# Altium PCB control_board_v2.PcbDoc (part 2 of 2)
Units mil, origin at the board's own origin, x right, y up, seen from the top; angles counter-clockwise.
Board outline 4214.76 x 4940 mil, 2 copper layers (Top Layer, Bottom Layer); 54 components, 71 nets, 299 pads, 38 vias.
Unrouted connection lines stored in the file: 3.
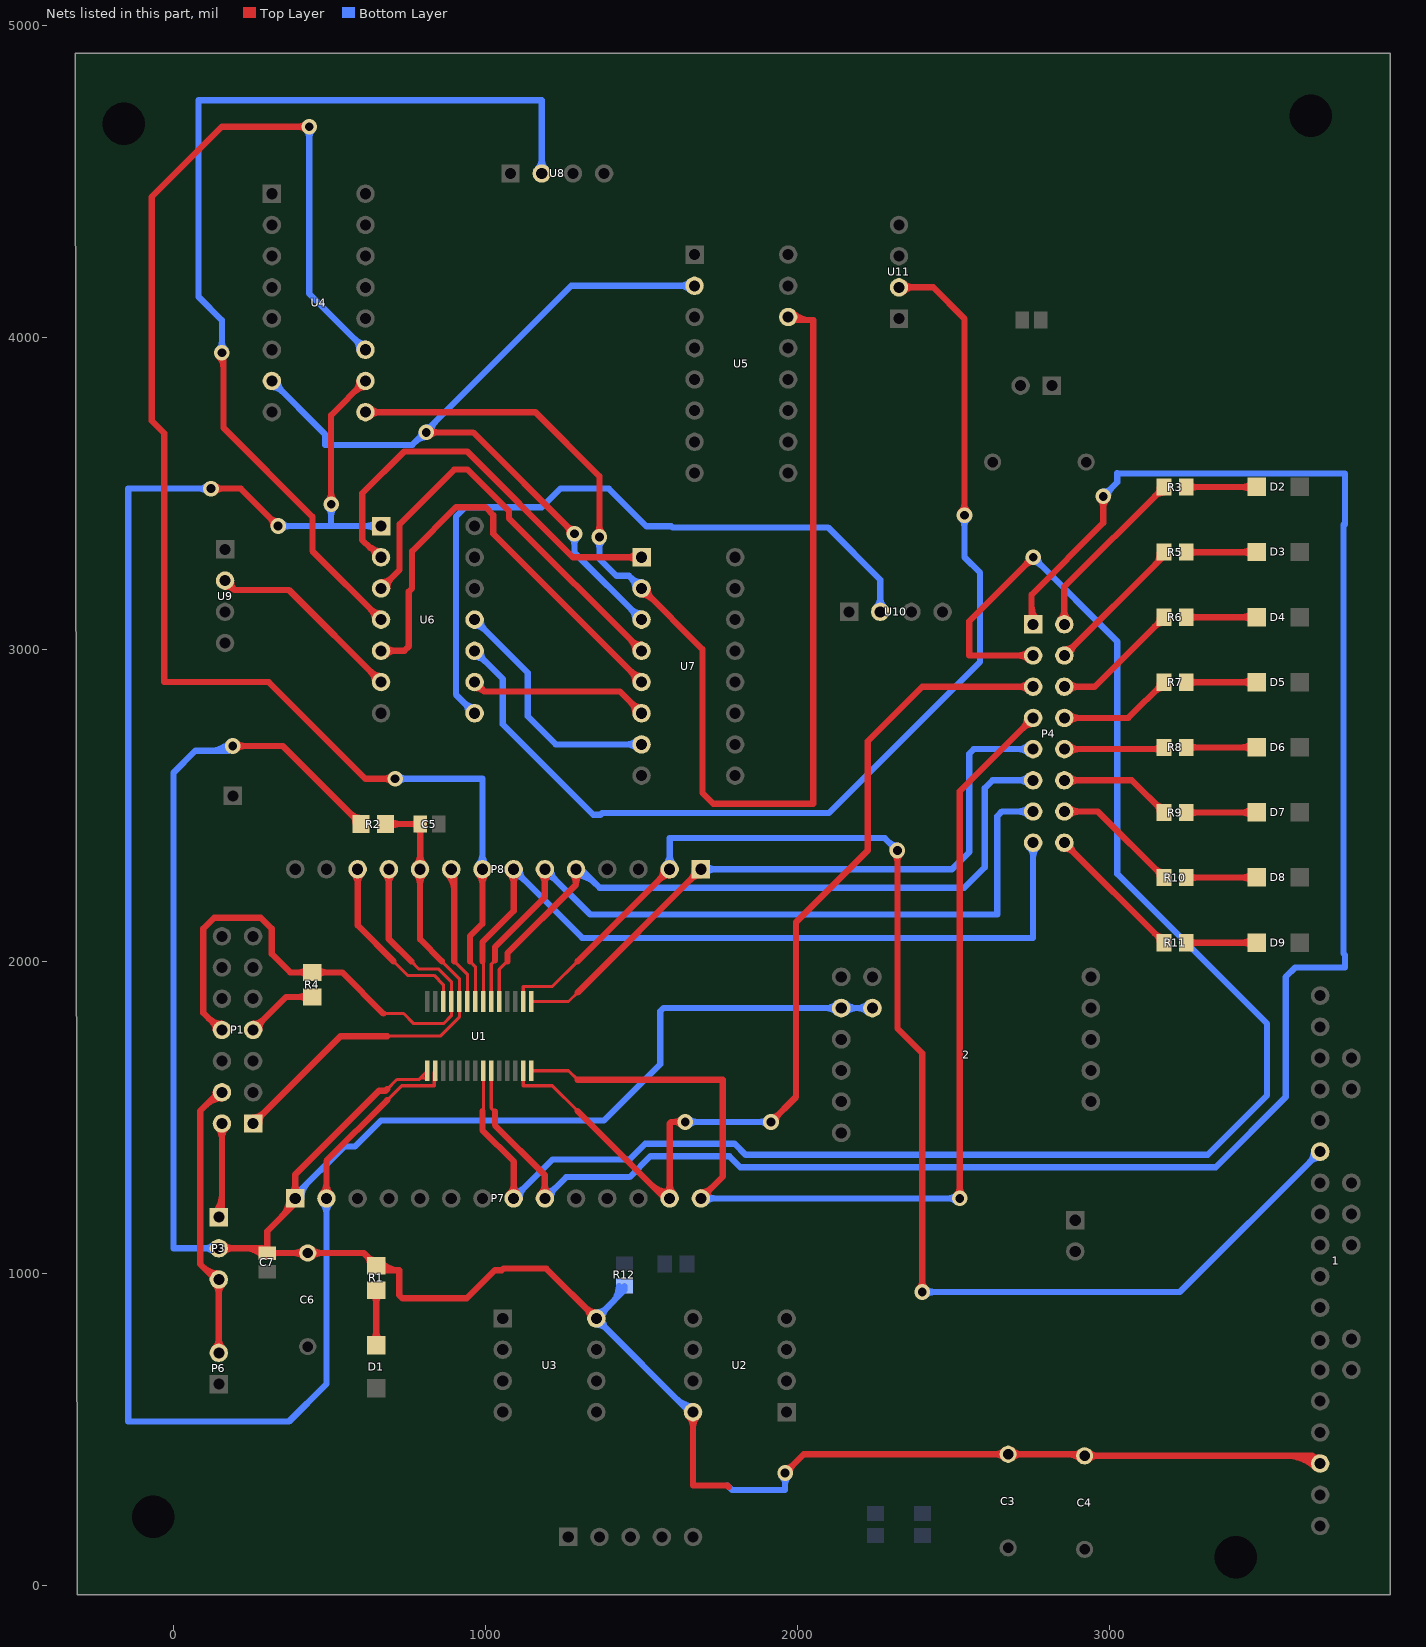
[diagram p2: the nets of this part, all layers, seen from the top]

## Via types
v1: diameter 50, hole 28, Top Layer to Bottom Layer, 38 vias

## Nets (pads, with @x,y where several pads share a name; then routed paths per layer and width w, separated by ;. In a path a pad name is that pad's centre, name@x,y a point inside that pad or via, vN(x,y) a via of type N, cw(c..) or ccw(c..) an arc to the next point about the centre after c; other vN are vias at no path point) (continued)
M2IN2: 1.12 P8.2 U1.16 | length 4880.6
  Top Layer w10: U1.16@1120.75,1871 1120.75,1919 1214,1919 1295,2000
  Top Layer w20: 1295,2000 P8.2@1590,2295 ; P8.2@1570.47,2295 cw(c1523.33,2295) 1556.66,2261.66 cw(c1590,2228.33) P8.2@1590,2275.47 ; v1@2309.39,2344.39 cw(c2283.79,2318.79) 2320,2318.79 cw(c2356.21,2318.79) v1@2330.61,2344.39 ; v1(2320,2355) 2320,1785 2400,1705 v1(2400,940) ; v1@2389.39,950.61 ccw(c2363.79,976.21) 2400,976.21 ccw(c2436.21,976.21) v1@2410.61,950.61
  Bottom Layer w20: P8.2@1576.19,2308.81 ccw(c1542.86,2342.14) 1590,2342.14 ccw(c1637.14,2342.14) P8.2@1603.81,2308.81 ; P8.2@1590,2295 1590,2395 2280,2395 v1(2320,2355) ; v1@2305,2355 ccw(c2268.79,2355) 2294.39,2380.61 ccw(c2320,2406.21) v1@2320,2370 ; v1(2400,940) 3225,940 1.12@3675,1390 ; v1@2410.61,929.39 cw(c2436.21,903.79) 2436.21,940 cw(c2436.21,976.21) v1@2410.61,950.61 ; 1.12@3655,1390 cw(c3606.72,1390) 3640.86,1355.86 cw(c3675,1321.72) 1.12@3675,1370
NetD1_1: D1.1 R1.1 | length 317.4
  Top Layer w20: D1.1@636.19,782.71 ccw(c602.86,816.04) 650,816.04 ccw(c697.14,816.04) D1.1@663.81,782.71 ; R1.1@637.58,933.21 cw(c607.61,903.24) 650,903.24 cw(c692.39,903.24) R1.1@662.42,933.21 ; D1.1@650,768.9 650,945 R1.1@650,945.63
NetD2_1: D2.1 R3.2 | length 351.6
  Top Layer w20: R3.2@3245.43,3520 3470.58,3520 D2.1@3471.1,3520.52 ; R3.2@3255.07,3510.37 cw(c3278.32,3487.11) 3278.32,3520 cw(c3278.32,3552.89) R3.2@3255.07,3529.63 ; 3422.7,3520 ccw(c3422.7,3568.92) D2.1@3457.29,3534.33 ; 3425.21,3520 cw(c3425.21,3474.63) D2.1@3457.29,3506.71
NetD3_1: D3.1 R5.2 | length 351.6
  Top Layer w20: R5.2@3245.43,3311.35 3470.58,3311.35 D3.1@3471.1,3311.87 ; R5.2@3255.07,3301.72 cw(c3278.32,3278.47) 3278.32,3311.35 cw(c3278.32,3344.24) R5.2@3255.07,3320.99 ; 3422.7,3311.35 ccw(c3422.7,3360.27) D3.1@3457.29,3325.68 ; 3425.21,3311.35 cw(c3425.21,3265.99) D3.1@3457.29,3298.07
NetD4_1: D4.1 R6.2 | length 351.6
  Top Layer w20: R6.2@3245.43,3102.71 3470.58,3102.71 D4.1@3471.1,3103.23 ; R6.2@3255.07,3093.08 cw(c3278.32,3069.82) 3278.32,3102.71 cw(c3278.32,3135.59) R6.2@3255.07,3112.34 ; 3422.7,3102.71 ccw(c3422.7,3151.63) D4.1@3457.29,3117.04 ; 3425.21,3102.71 cw(c3425.21,3057.34) D4.1@3457.29,3089.42
NetD5_1: D5.1 R7.2 | length 351.6
  Top Layer w20: R7.2@3245.43,2894.06 3470.58,2894.06 D5.1@3471.1,2894.58 ; R7.2@3255.07,2884.43 cw(c3278.32,2861.18) 3278.32,2894.06 cw(c3278.32,2926.95) R7.2@3255.07,2903.7 ; 3422.71,2894.06 ccw(c3422.71,2942.98) D5.1@3457.29,2908.39 ; 3425.21,2894.06 cw(c3425.21,2848.69) D5.1@3457.29,2880.77
NetD6_1: D6.1 R8.2 | length 351.6
  Top Layer w20: R8.2@3245.43,2685.42 3470.58,2685.42 D6.1@3471.1,2685.94 ; R8.2@3255.07,2675.79 cw(c3278.32,2652.53) 3278.32,2685.42 cw(c3278.32,2718.3) R8.2@3255.07,2695.05 ; 3422.71,2685.42 ccw(c3422.71,2734.33) D6.1@3457.29,2699.74 ; 3425.21,2685.42 cw(c3425.21,2640.04) D6.1@3457.29,2672.13
NetD7_1: D7.1 R9.2 | length 351.6
  Top Layer w20: R9.2@3245.43,2476.77 3470.58,2476.77 D7.1@3471.1,2477.29 ; R9.2@3255.07,2467.14 cw(c3278.32,2443.89) 3278.32,2476.77 cw(c3278.32,2509.66) R9.2@3255.07,2486.4 ; 3422.7,2476.77 ccw(c3422.7,2525.69) D7.1@3457.29,2491.1 ; 3425.21,2476.77 cw(c3425.21,2431.4) D7.1@3457.29,2463.48
NetD8_1: D8.1 R10.2 | length 351.6
  Top Layer w20: R10.2@3245.43,2268.13 3470.58,2268.13 D8.1@3471.1,2268.65 ; R10.2@3255.07,2258.49 cw(c3278.32,2235.24) 3278.32,2268.13 cw(c3278.32,2301.01) R10.2@3255.07,2277.76 ; 3422.7,2268.13 ccw(c3422.7,2317.04) D8.1@3457.29,2282.45 ; 3425.21,2268.13 cw(c3425.21,2222.76) D8.1@3457.29,2254.84
NetD9_1: D9.1 R11.2 | length 351.6
  Top Layer w20: R11.2@3245.43,2059.48 3470.58,2059.48 D9.1@3471.1,2060 ; R11.2@3255.07,2049.85 cw(c3278.32,2026.59) 3278.32,2059.48 cw(c3278.32,2092.37) R11.2@3255.07,2069.11 ; 3422.7,2059.48 ccw(c3422.7,2108.4) D9.1@3457.29,2073.81 ; 3425.21,2059.48 cw(c3425.21,2014.11) D9.1@3457.29,2046.19
NetP4_2: P4.2 R3.1 | length 698.1
  Top Layer w20: P4.2@2841.19,3093.81 ccw(c2807.86,3127.14) 2855,3127.14 ccw(c2902.14,3127.14) P4.2@2868.81,3093.81 ; P4.2@2855,3080 2855,3200.43 R3.1@3174.57,3520 ; 3144.59,3490.02 cw(c3174.57,3460.05) R3.1@3174.57,3502.44 ; R3.1@3154.1,3499.53 ccw(c3137.56,3516.06) R3.1@3160.95,3516.06
NetP4_4: P4.4 R5.1 | length 578.5
  Top Layer w20: P4.4@2855,2980 3174.57,3299.57 R5.1@3174.57,3311.35 ; P4.4@2855,2999.53 ccw(c2855,3046.67) 2888.34,3013.34 ccw(c2921.67,2980) P4.4@2874.53,2980 ; 3145.76,3270.76 ccw(c3109.11,3307.42) R5.1@3160.95,3307.42
NetP4_6: P4.6 R6.1 | length 537.5
  Top Layer w20: P4.6@2855,2880 2951.86,2880 R6.1@3174.57,3102.71 ; P4.6@2868.81,2866.19 cw(c2902.14,2832.86) 2902.14,2880 cw(c2902.14,2927.14) P4.6@2868.81,2893.81 ; 3144.59,3072.73 cw(c3174.57,3042.76) R6.1@3174.57,3085.15 ; R6.1@3154.1,3082.24 ccw(c3137.56,3098.77) R6.1@3160.95,3098.77
NetP4_8: P4.8 R7.1 | length 492.5
  Top Layer w20: P4.8@2855,2780 3060.5,2780 R7.1@3174.57,2894.06 ; P4.8@2868.81,2766.19 cw(c2902.14,2732.86) 2902.14,2780 cw(c2902.14,2827.14) P4.8@2868.81,2793.81 ; 3144.59,2864.09 cw(c3174.57,2834.11) R7.1@3174.57,2876.51 ; R7.1@3154.1,2873.59 ccw(c3137.56,2890.13) R7.1@3160.95,2890.13
NetP4_10: P4.10 R8.1 | length 447.5
  Top Layer w20: P4.10@2855,2680 3169.15,2680 R8.1@3174.57,2685.42 ; P4.10@2868.81,2666.19 cw(c2902.14,2632.86) 2902.14,2680 cw(c2902.14,2727.14) P4.10@2868.81,2693.81 ; 3138.11,2680 ccw(c3138.11,2717.94) R8.1@3164.94,2691.11 ; 3145.26,2680 cw(c3145.26,2652.17) R8.1@3164.94,2671.85
NetP4_12: P4.12 R9.1 | length 488
  Top Layer w20: P4.12@2855,2580 3071.34,2580 R9.1@3174.57,2476.77 ; P4.12@2868.81,2566.19 cw(c2902.14,2532.86) 2902.14,2580 cw(c2902.14,2627.14) P4.12@2868.81,2593.81 ; 3144.59,2506.75 ccw(c3174.57,2536.72) R9.1@3174.57,2494.33 ; R9.1@3154.1,2497.24 cw(c3137.56,2480.71) R9.1@3160.95,2480.71
NetP4_14: P4.14 R10.1 | length 533
  Top Layer w20: P4.14@2855,2480 2962.69,2480 R10.1@3174.57,2268.13 ; P4.14@2868.81,2466.19 cw(c2902.14,2432.86) 2902.14,2480 cw(c2902.14,2527.14) P4.14@2868.81,2493.81 ; 3144.59,2298.1 ccw(c3174.57,2328.08) R10.1@3174.57,2285.68 ; R10.1@3154.1,2288.6 cw(c3137.56,2272.06) R10.1@3160.95,2272.06
NetP4_16: P4.16 R11.1 | length 578.6
  Top Layer w20: P4.16@2855,2360.47 cw(c2855,2315.63) 2886.71,2347.34 ; P4.16@2855,2380 2855,2379.05 R11.1@3174.57,2059.48 ; P4.16@2874.53,2380 ccw(c2923.97,2380) 2889.01,2345.04 ; 3144.59,2089.46 ccw(c3174.57,2119.43) R11.1@3174.57,2077.04 ; R11.1@3154.1,2079.95 cw(c3137.56,2063.42) R11.1@3160.95,2063.42
P1.7/TDO: P8.9 U1.23 | length 509.2
  Top Layer w10: 900,2000 941.61,1958.39 U1.23@941.61,1871
  Top Layer w20: P8.9@876.19,2281.19 cw(c818.71,2223.71) 900,2223.71 ; P8.9@890,2295 900,2285 900,2000
P2.7: P8.12 U1.26 | length 661.8
  Top Layer w10: 704.87,2000 749.87,1955 835,1955 864.84,1925.16 U1.26@864.84,1871
  Top Layer w20: P8.12@576.19,2281.19 cw(c542.86,2247.86) 590,2247.86 cw(c637.14,2247.86) P8.12@603.81,2281.19 ; P8.12@590,2295 590,2114.87 704.87,2000
P3.0: P4.1 P7.9 U1.9 | length 6874.4
  Top Layer w10: U1.9@1018.39,1649 1018.39,1529.41 1030,1517.8
  Top Layer w20: 1030,1517.8 1030,1475 1190,1315 P7.9@1190,1240 P7.9@1190,1225 ; P7.9@1176.19,1253.81 ccw(c1142.86,1287.14) 1190,1287.14 ccw(c1237.14,1287.14) P7.9@1203.81,1253.81 ; P4.1@2741.19,3093.81 ccw(c2719.93,3115.07) 2750,3115.07 ; 2750,3139.21 ccw(c2814.21,3139.21) P4.1@2768.81,3093.81 ; P4.1@2755,3080 2750,3085 2750,3175 2980,3405 v1(2980,3490) ; v1@2969.39,3479.39 cw(c2943.79,3453.79) 2980,3453.79 cw(c3016.21,3453.79) v1@2990.61,3479.39
  Bottom Layer w20: P7.9@1190,1240 1258.28,1308.28 1461.72,1308.28 1528.43,1375 1781.57,1375 1816.57,1340 3340,1340 3565,1565 3565,1950 3595,1980 3755,1980 3755,2020 3750,2025 3750,3400 ; P7.9@1190,1259.53 ccw(c1190,1306.67) 1223.34,1273.34 ccw(c1256.67,1240) P7.9@1209.53,1240 ; v1(2980,3490) 3025,3535 3025,3565 3026.25,3563.75 3755,3563.75 3755,3400 ; v1@2980,3505 ccw(c2980,3541.21) 3005.61,3515.61 ccw(c3031.21,3490) v1@2995,3490
P3.1: P4.3 P7.8 U1.8 | length 6022.6
  Top Layer w10: 992.8,1520 U1.8@992.8,1649
  Top Layer w20: 990,1520 990,1458.43 1090,1358.43 P7.8@1090,1240 P7.8@1090,1225 ; P7.8@1076.19,1253.81 ccw(c1042.86,1287.14) 1090,1287.14 ccw(c1137.14,1287.14) P7.8@1103.81,1253.81 ; v1@2740,3295 cw(c2703.79,3295) 2729.39,3269.39 cw(c2755,3243.79) v1@2755,3280 ; P4.3@2741.19,2966.19 ccw(c2707.86,2932.86) 2707.86,2980 ccw(c2707.86,3027.14) P4.3@2741.19,2993.81 ; P4.3@2755,2980 2550,2980 2550,3090 v1(2755,3295)
  Bottom Layer w20: P7.8@1090,1240 1215,1365 1461.86,1365 1511.86,1415 1798.14,1415 1833.14,1380 3315,1380 3505,1570 3505,1800 3025,2280 3025,3025 v1(2755,3295) ; P7.8@1090,1259.53 ccw(c1090,1306.67) 1123.34,1273.34 ccw(c1156.67,1240) P7.8@1109.53,1240 ; v1@2755,3280 cw(c2755,3243.79) 2780.61,3269.39 cw(c2806.21,3295) v1@2770,3295
P3.2: P4.5 P7.13 U1.13 | length 3610
  Top Layer w10: U1.13@1120.75,1649 1120.75,1601 1214,1601 1295,1520
  Top Layer w20: 1295,1520 P7.13@1582.5,1232.5 ; 1531.06,1283.94 ccw(c1590,1342.88) P7.13@1590,1259.53 ; P7.13@1576.19,1253.81 ccw(c1542.86,1287.14) 1590,1287.14 ccw(c1637.14,1287.14) P7.13@1603.81,1253.81 ; P7.13@1590,1240 1590,1480 1595,1485 v1(1640,1485) ; v1@1629.39,1474.39 ccw(c1603.79,1448.79) 1603.79,1485 ccw(c1603.79,1521.21) v1@1629.39,1495.61 ; v1(1915,1485) 1995,1565 1995,2125 2225,2355 2225,2705 2400,2880 P4.5@2755,2880 ; v1@1915,1500 ccw(c1915,1536.21) 1940.61,1510.61 ccw(c1966.21,1485) v1@1930,1485 ; P4.5@2741.19,2866.19 ccw(c2707.86,2832.86) 2707.86,2880 ccw(c2707.86,2927.14) P4.5@2741.19,2893.81
  Bottom Layer w20: v1(1640,1485) v1@1900,1485 ; v1@1650.61,1474.39 cw(c1676.21,1448.79) 1676.21,1485 cw(c1676.21,1521.21) v1@1650.61,1495.61 ; v1@1904.39,1474.39 ccw(c1878.79,1448.79) 1878.79,1485 ccw(c1878.79,1521.21) v1@1904.39,1495.61 ; v1@1907.5,1492.5 v1@1910,1495
P3.3: P4.7 P7.14 U1.14 | length 3837.9
  Top Layer w10: U1.14@1146.34,1649 1266,1649 1295,1620
  Top Layer w20: 1295,1620 1760,1620 1760,1310 P7.14@1690,1240 ; P7.14@1690,1259.53 ccw(c1690,1306.67) 1723.34,1273.34 ccw(c1756.67,1240) P7.14@1709.53,1240 ; v1@2509.39,1250.61 ccw(c2483.79,1276.21) 2520,1276.21 ccw(c2556.21,1276.21) v1@2530.61,1250.61 ; v1(2520,1240) 2520,2545 P4.7@2755,2780 ; P4.7@2735.47,2780 cw(c2688.33,2780) 2721.66,2746.66 cw(c2755,2713.33) P4.7@2755,2760.47
  Bottom Layer w20: P7.14@1690,1240 v1(2520,1240) ; P7.14@1703.81,1226.19 cw(c1737.14,1192.86) 1737.14,1240 cw(c1737.14,1287.14) P7.14@1703.81,1253.81 ; v1@2509.39,1229.39 ccw(c2483.79,1203.79) 2483.79,1240 ccw(c2483.79,1276.21) v1@2509.39,1250.61
P3.4: P4.9 P8.1 U1.15 | length 2350.4
  Top Layer w10: U1.15@1146.34,1871 1266,1871 1295,1900
  Top Layer w20: 1295,1900 P8.1@1690,2295 ; P8.1@1670.47,2295 cw(c1623.33,2295) 1656.66,2261.66 cw(c1690,2228.33) P8.1@1690,2275.47
  Bottom Layer w20: P8.1@1690,2295 2495,2295 2550,2350 2550,2665 2565,2680 P4.9@2755,2680 ; P8.1@1703.81,2281.19 cw(c1737.14,2247.86) 1737.14,2295 cw(c1737.14,2342.14) P8.1@1703.81,2308.81 ; P4.9@2741.19,2666.19 ccw(c2707.86,2632.86) 2707.86,2680 ccw(c2707.86,2727.14) P4.9@2741.19,2693.81
P3.5: P4.11 P8.5 U1.19 | length 2523.7
  Top Layer w10: U1.19@1045,1872.02 U1.19@1043.98,1871 1043.98,1973.98 1070,2000
  Top Layer w20: 1070,2000 1070,2026.02 1290,2246.02 P8.5@1290,2295 ; P8.5@1276.19,2281.19 cw(c1242.86,2247.86) 1290,2247.86 cw(c1337.14,2247.86) P8.5@1303.81,2281.19
  Bottom Layer w20: P8.5@1290,2275.47 cw(c1290,2190.15) 1350.33,2250.48 ; P8.5@1290,2295 1305.82,2295 1365.34,2235.47 2534.53,2235.47 2600,2300.94 2600,2555 2625,2580 P4.11@2755,2580 ; P4.11@2741.19,2566.19 ccw(c2707.86,2532.86) 2707.86,2580 ccw(c2707.86,2627.14) P4.11@2741.19,2593.81
P3.6: P4.13 P8.6 U1.20 | length 2663.5
  Top Layer w10: U1.20@1018.39,1871 1018.39,1990.59 1030,2002.2
  Top Layer w20: 1030,2002.2 1030,2045 1190,2205 P8.6@1190,2295 ; P8.6@1176.19,2281.19 cw(c1142.86,2247.86) 1190,2247.86 cw(c1237.14,2247.86) P8.6@1203.81,2281.19
  Bottom Layer w20: P8.6@1190,2275.47 cw(c1190,2228.33) 1223.34,2261.66 cw(c1256.67,2295) P8.6@1209.53,2295 ; P8.6@1190,2295 1335,2150 2640,2150 2640,2465 2655,2480 P4.13@2755,2480 ; P4.13@2741.19,2466.19 ccw(c2707.86,2432.86) 2707.86,2480 ccw(c2707.86,2527.14) P4.13@2741.19,2493.81
P3.7: P4.15 P8.7 U1.21 | length 2748.7
  Top Layer w10: U1.21@992.8,1871 992.8,2000
  Top Layer w20: 990,2000 990,2061.57 1090,2161.57 P8.7@1090,2295 ; P8.7@1076.19,2281.19 cw(c1042.86,2247.86) 1090,2247.86 cw(c1137.14,2247.86) P8.7@1103.81,2281.19
  Bottom Layer w20: P8.7@1090,2275.47 cw(c1090,2228.33) 1123.34,2261.66 cw(c1156.67,2295) P8.7@1109.53,2295 ; P8.7@1090,2295 1310,2075 2755,2075 P4.15@2755,2380 ; P4.15@2741.19,2366.19 cw(c2707.86,2332.86) 2755,2332.86 cw(c2802.14,2332.86) P4.15@2768.81,2366.19
RST/SBWTDIO: C5.2 P1.1 P8.10 R2.1 U1.24 | length 1961.9
  Top Layer w10: 685,1760 855,1760 916.02,1821.02 U1.24@916.02,1871 916.02,1943.98 860,2000
  Top Layer w20: P1.1@255,1480 535,1760 685,1760 ; P1.1@255,1499.53 ccw(c255,1546.67) 288.34,1513.34 ccw(c321.67,1480) P1.1@274.53,1480 ; R2.1@679.37,2440 C5.2@790.47,2440 790.47,2295.47 P8.10@790,2295 790,2070 860,2000 ; R2.1@691.79,2427.58 cw(c721.76,2397.61) 721.76,2440 cw(c721.76,2482.39) R2.1@691.79,2452.42 ; P8.10@776.19,2281.19 cw(c742.86,2247.86) 790,2247.86 cw(c837.14,2247.86) P8.10@803.81,2281.19 ; P8.10@776.19,2308.81 ccw(c741.72,2343.28) 790.47,2343.28 ; C5.2@782.23,2425.85 cw(c762.34,2405.96) 790.47,2405.96 cw(c818.61,2405.96) C5.2@798.71,2425.85 ; C5.2@782.23,2431.76 ccw(c762.34,2411.87) 762.34,2440 ccw(c762.34,2468.13) C5.2@782.23,2448.24 ; 790.47,2341 ccw(c836,2341) P8.10@803.81,2308.81
S0: U4.9 U5.14 U7.2 | length 4413.4
  Top Layer w20: U4.9@615,3760 1160,3760 1365,3555 v1(1365,3360) ; U4.9@628.81,3746.19 cw(c662.14,3712.86) 662.14,3760 cw(c662.14,3807.14) U4.9@628.81,3773.81 ; v1@1354.39,3370.61 ccw(c1328.79,3396.21) 1365,3396.21 ccw(c1401.21,3396.21) v1@1375.61,3370.61 ; U7.2@1500,3175.47 cw(c1500,3128.33) 1533.34,3161.66 cw(c1566.67,3195) U7.2@1519.53,3195 ; U7.2@1500,3195 1695,3000 1695,2540 1730,2505 2050,2505 2050,4055 1980,4055 U5.14@1970,4065 ; U5.14@1983.81,4078.81 ccw(c2041.29,4136.29) 2041.29,4055
  Bottom Layer w20: v1@1354.39,3349.39 cw(c1328.79,3323.79) 1365,3323.79 cw(c1401.21,3323.79) v1@1375.61,3349.39 ; v1(1365,3360) 1365,3290 1419.53,3235.47 1459.53,3235.47 U7.2@1500,3195 ; U7.2@1480.47,3195 ccw(c1433.33,3195) 1466.66,3228.34 ccw(c1500,3261.67) U7.2@1500,3214.53
S1: U4.7 U5.2 U7.3 | length 3136.9
  Top Layer w20: v1(810,3695) 960,3695 v1(1285,3370) ; v1@820.61,3684.39 cw(c846.21,3658.79) 846.21,3695 cw(c846.21,3731.21) v1@820.61,3705.61 ; v1@1270,3370 ccw(c1233.79,3370) 1259.39,3395.61 ccw(c1285,3421.21) v1@1285,3385
  Bottom Layer w20: U4.7@315,3840.47 cw(c315,3793.33) 348.34,3826.66 cw(c381.67,3860) U4.7@334.53,3860 ; U4.7@315,3860 485,3690 485,3655 765,3655 1275,4165 U5.2@1670,4165 ; 775.86,3665.86 cw(c810,3631.72) v1@810,3680 ; 787.93,3677.93 ccw(c770.86,3695) v1@795,3695 ; v1@810,3710 ccw(c810,3734.14) 827.07,3717.07 ; v1@825,3695 cw(c873.28,3695) 839.14,3729.14 ; v1@1274.39,3359.39 cw(c1248.79,3333.79) 1285,3333.79 cw(c1321.21,3333.79) v1@1295.61,3359.39 ; v1@1285,3355 1285,3310 U7.3@1500,3095 ; U7.3@1480.47,3095 ccw(c1433.33,3095) 1466.66,3128.34 ccw(c1500,3161.67) U7.3@1500,3114.53 ; U5.2@1656.19,4151.19 ccw(c1622.86,4117.86) 1622.86,4165 ccw(c1622.86,4212.14) U5.2@1656.19,4178.81
SBWTCK: P1.7 R4.1 | length 374.4
  Top Layer w20: P1.7@255,1780 360.63,1885.63 R4.1@445,1885.63 ; P1.7@255,1799.53 ccw(c255,1846.67) 288.34,1813.34 ccw(c321.67,1780) P1.7@274.53,1780 ; R4.1@430.62,1873.21 ccw(c400.64,1843.24) 400.64,1885.63 ccw(c400.64,1928.02) R4.1@430.62,1898.05
SONAR_RST: P8.8 U1.22 U4.11 | length 5302.2
  Top Layer w10: 950,2000 967.2,1982.8 U1.22@967.2,1871
  Top Layer w20: v1@424.39,4664.39 ccw(c398.79,4638.79) 398.79,4675 ccw(c398.79,4711.21) v1@424.39,4685.61 ; v1@440,4680 v1(435,4675) 155,4675 -70,4450 -70,3732.22 -30,3692.22 -30,2895 305,2895 615,2585 v1(710,2585) ; v1@699.39,2574.39 ccw(c673.79,2548.79) 673.79,2585 ccw(c673.79,2621.21) v1@699.39,2595.61 ; 950,2000 950,2080 990,2120 P8.8@990,2295 ; P8.8@976.19,2281.19 cw(c942.86,2247.86) 990,2247.86 cw(c1037.14,2247.86) P8.8@1003.81,2281.19
  Bottom Layer w20: v1@424.39,4664.39 cw(c398.79,4638.79) 435,4638.79 cw(c471.21,4638.79) v1@445.61,4664.39 ; v1(435,4675) 435,4140 U4.11@615,3960 ; U4.11@595.47,3960 ccw(c548.33,3960) 581.66,3993.34 ccw(c615,4026.67) U4.11@615,3979.53 ; v1(710,2585) 990,2585 P8.8@990,2295 ; v1@720.61,2574.39 cw(c746.21,2548.79) 746.21,2585 cw(c746.21,2621.21) v1@720.61,2595.61 ; P8.8@976.19,2308.81 ccw(c942.86,2342.14) 990,2342.14 ccw(c1037.14,2342.14) P8.8@1003.81,2308.81
TEST/SBWTCK: P1.8 P8.11 R4.2 U1.25 | length 2233.5
  Top Layer w10: 672.5,1832.5 737.5,1832.5 770,1800 865,1800 890.43,1825.43 U1.25@890.43,1871 890.43,1934.57 850,1975 786.43,1975 761.43,2000
  Top Layer w20: 113.13,1816.87 ccw(c155,1858.74) P1.8@155,1799.53 ; 125.2,1804.8 cw(c100.4,1780) P1.8@135.47,1780 ; P1.8@155,1780 152.5,1777.5 95.47,1834.53 95.47,2104.66 130.34,2139.53 279.66,2139.53 314.53,2104.66 314.53,2023.61 373.77,1964.37 R4.2@445,1964.37 540.63,1964.37 672.5,1832.5 ; R4.2@430.62,1951.95 ccw(c400.64,1921.98) 400.64,1964.37 ccw(c400.64,2006.76) R4.2@430.62,1976.79 ; R4.2@459.38,1951.95 cw(c489.36,1921.98) 489.36,1964.37 cw(c489.36,2006.76) R4.2@459.38,1976.79 ; P8.11@676.19,2281.19 cw(c642.86,2247.86) 690,2247.86 cw(c737.14,2247.86) P8.11@703.81,2281.19 ; P8.11@690,2295 690,2071.43 761.43,2000
TRIG: P7.2 U1.2 U4.10 U6.1 | length 6905.9
  Top Layer w10: 685,1555 731,1601 835.66,1601 835.66,1645.41 U1.2@839.25,1649 ; 835.66,1609.5 cw(c852.75,1609.5) U1.2@840.67,1621.59
  Top Layer w20: v1(120,3515) 215,3515 v1(335,3395) ; v1@130.61,3504.39 cw(c156.21,3478.79) 156.21,3515 cw(c156.21,3551.21) v1@130.61,3525.61 ; v1@320,3395 ccw(c283.79,3395) 309.39,3420.61 ccw(c335,3446.21) v1@335,3410 ; P7.2@476.19,1253.81 ccw(c442.86,1287.14) 490,1287.14 ccw(c537.14,1287.14) P7.2@503.81,1253.81 ; P7.2@490,1240 490,1360 685,1555 ; v1@494.39,3475.61 ccw(c468.79,3501.21) 505,3501.21 ccw(c541.21,3501.21) v1@515.61,3475.61 ; v1(505,3465) 505,3750 U4.10@615,3860 ; U4.10@595.47,3860 cw(c548.33,3860) 581.66,3826.66 cw(c615,3793.33) U4.10@615,3840.47
  Bottom Layer w20: v1@109.39,3504.39 ccw(c83.79,3478.79) 83.79,3515 ccw(c83.79,3551.21) v1@109.39,3525.61 ; v1(120,3515) -145,3515 -145,525 370,525 490,645 P7.2@490,1240 ; v1(335,3395) 505,3395 ; v1@345.61,3384.39 cw(c371.21,3358.79) 371.21,3395 cw(c371.21,3431.21) v1@345.61,3405.61 ; P7.2@476.19,1226.19 cw(c442.86,1192.86) 490,1192.86 cw(c537.14,1192.86) P7.2@503.81,1226.19 ; v1@494.39,3454.39 cw(c468.79,3428.79) 505,3428.79 cw(c541.21,3428.79) v1@515.61,3454.39 ; v1(505,3465) 505,3395 ; U6.1@651.19,3381.19 ccw(c617.86,3347.86) 617.86,3395 ccw(c617.86,3442.14) U6.1@651.19,3408.81 ; U6.1@665,3395 505,3395
TRIG_N: U6.2 U7.1 | length 1460.4
  Top Layer w20: U6.2@645.53,3296.51 ccw(c609.32,3299.32) 635,3325 ; U6.2@663.49,3314.47 cw(c660.68,3350.68) 635,3325 ; U6.2@665,3295 635,3325 ; U7.1@1486.19,3281.19 ccw(c1452.86,3247.86) 1452.86,3295 ccw(c1452.86,3342.14) U7.1@1486.19,3308.81 ; U7.1@1500,3295 1280,3295 941,3634 739,3634 605,3500 605,3350 630,3325 635,3325
VCC: 1.2 2.1 2.7 C3.1 C4.1 C6.1 C7.2 P3.2 P7.1 R1.2 R2.2 R12.2 U1.1 U2.8 U3.8 | length 12167.6
  Top Layer w10: 685,1590.36 715.64,1621 785.66,1621 ; U1.1@812.31,1621.53 ccw(c799.26,1607.4) 785.66,1621 ; U1.1@813.66,1649 785.66,1621
  Top Layer w20: P3.2@145,1080 284.53,1080 C7.2@299.53,1065 ; P3.2@158.81,1066.19 cw(c192.14,1032.86) 192.14,1080 cw(c192.14,1127.14) P3.2@158.81,1093.81 ; v1(190,2690) 350.63,2690 R2.2@600.63,2440 ; v1@200.61,2679.39 cw(c226.21,2653.79) 226.21,2690 cw(c226.21,2726.21) v1@200.61,2700.61 ; 228.61,1080 cw(c228.61,999.04) C7.2@285.85,1056.29 ; C7.2@276.89,1080 cw(c276.89,1047.33) C7.2@300,1070.43 ; C7.2@291.76,1072.77 ccw(c271.87,1092.66) 300,1092.66 ccw(c328.13,1092.66) C7.2@308.24,1072.77 ; C7.2@314.15,1056.29 cw(c335.18,1035.25) 335.18,1065 ; C7.2@314.15,1072.77 ccw(c332.9,1091.52) 332.9,1065 ; 346.06,1181.06 ccw(c287.12,1240) P7.1@370.47,1240 ; P7.1@376.19,1253.81 ccw(c342.86,1287.14) 390,1287.14 ccw(c437.14,1287.14) P7.1@403.81,1253.81 ; C6.1@417.58,1052.58 ccw(c387.61,1022.61) 387.61,1065 ccw(c387.61,1107.39) C6.1@417.58,1077.42 ; C6.1@442.42,1052.58 cw(c472.39,1022.61) 472.39,1065 cw(c472.39,1107.39) C6.1@442.42,1077.42 ; 567.29,2473.34 ccw(c600.63,2506.67) R2.2@600.63,2459.53 ; 572.05,2468.58 cw(c545.43,2441.97) R2.2@583.07,2441.97 ; 616.66,1057.71 cw(c583.33,1024.37) R1.2@630.47,1024.37 ; 621.42,1052.95 ccw(c648.03,1079.57) R1.2@648.03,1041.93 ; R1.2@650.15,1022.74 ccw(c678.67,1048.28) R1.2@678.67,1010 ; R1.2@665.05,1036.08 ccw(c723.43,1088.37) 723.43,1010 ; 685,1590.36 679.64,1585 658.43,1585 390,1316.57 P7.1@390,1240 390,1225 300,1135 C7.2@300,1065 ; U3.8@1335.47,855 ccw(c1288.33,855) 1321.66,888.34 ccw(c1355,921.67) U3.8@1355,874.53 ; U3.8@1355,855 1195,1015 1057.22,1015 1052.22,1010 1030,1010 940,920 733.43,920 723.43,930 723.43,1010 ; U2.8@1651.19,541.19 cw(c1617.86,507.86) 1665,507.86 cw(c1712.14,507.86) U2.8@1678.81,541.19 ; U2.8@1665,555 1665,320 1775,320 1780,315 ; v1(1960,360) 2020,420 C3.1@2675,420 2915,420 C4.1@2920,415 3650,415 ; v1@1960,375 ccw(c1960,411.21) 1985.61,385.61 ccw(c2011.21,360) v1@1975,360 ; C3.1@2662.58,407.58 ccw(c2632.61,377.61) 2632.61,420 ccw(c2632.61,462.39) C3.1@2662.58,432.42 ; C3.1@2687.42,407.58 cw(c2717.39,377.61) 2717.39,420 cw(c2717.39,462.39) C3.1@2687.42,432.42 ; 2865.54,420 cw(c2865.54,360.54) C4.1@2907.58,402.58 ; 2889.68,420 ccw(c2889.68,445.32) C4.1@2907.58,427.42 ; C4.1@2932.42,402.58 cw(c2962.39,372.61) 2962.39,415 cw(c2962.39,457.39) C4.1@2932.42,427.42 ; 3567.5,415 cw(c3567.5,282.5) 1.2@3661.19,376.19 ; 3615.79,415 cw(c3615.79,330.79) 1.2@3675.33,390.33 ; 1.2@3655.96,394.34 ccw(c3634.28,399.27) 3650,415 ; 1.2@3670.66,409.04 cw(c3665.73,430.72) 3650,415 ; 1.2@3675,390 3650,415 ; C7.2@299.53,1065 C7.2@300,1064.53 C7.2@300,1065 ; C7.2@299.53,1065 C7.2@300,1065 ; C7.2@300,1065 C6.1@430,1065 609.37,1065 R1.2@650,1024.37 664.37,1010 723.43,1010
  Bottom Layer w20: 117.57,2675 ccw(c117.57,2762.43) v1@179.39,2700.61 ; P3.2@131.19,1066.19 ccw(c97.86,1032.86) 97.86,1080 ccw(c97.86,1127.14) P3.2@131.19,1093.81 ; P3.2@145,1080 0,1080 0,2605 70,2675 175,2675 v1(190,2690) ; 165.86,2675 ccw(c165.86,2714.14) v1@193.54,2686.46 ; P7.1@390,1240 390,1250 546.25,1406.25 581.25,1406.25 665,1490 1380,1490 1560,1670 1560,1840 1570,1850 2.1@2140,1850 2.7@2240,1850 ; P7.1@390,1259.53 ccw(c390,1282.53) P7.1@406.26,1266.26 ; P7.1@409.53,1240 cw(c480.81,1240) 430.41,1290.41 ; U3.8@1355,835.47 cw(c1355,788.33) 1388.34,821.66 cw(c1421.67,855) 1374.53,855 cw(c1421.67,855) 1388.34,888.34 cw(c1355,921.67) U3.8@1355,874.53 ; 1404.73,904.73 ccw(c1349.88,959.57) R12.2@1427.44,959.57 ; R12.2@1445,959.57 1445,945 U3.8@1355,855 1655,555 U2.8@1665,555 ; 1614.59,595.41 ccw(c1665,645.81) U2.8@1665,574.53 ; 1638.74,571.26 cw(c1622.47,555) U2.8@1645.47,555 ; 1775,320 1790,305 1960,305 v1(1960,360) ; v1@1949.39,349.39 cw(c1923.79,323.79) 1960,323.79 cw(c1996.21,323.79) v1@1970.61,349.39 ; 2.1@2125.86,1835.86 ccw(c2091.72,1801.72) 2091.72,1850 ccw(c2091.72,1898.28) 2.1@2125.86,1864.14 ; 2.1@2154.14,1835.86 cw(c2188.28,1801.72) 2188.28,1850 cw(c2188.28,1898.28) 2.1@2154.14,1864.14 ; 2.7@2225.86,1835.86 ccw(c2191.72,1801.72) 2191.72,1850 ccw(c2191.72,1898.28) 2.7@2225.86,1864.14
VCC_EXT: P1.4 P3.3 P6.2 | length 1196.4
  Top Layer w20: 94.59,1020.41 ccw(c145,1070.81) P3.3@145,999.53 ; 104.59,1539.59 cw(c155,1489.19) P1.4@155,1560.47 ; 118.74,996.26 cw(c102.47,980) P3.3@125.47,980 ; 128.74,1563.74 ccw(c112.47,1580) P1.4@135.47,1580 ; P6.2@131.19,758.81 ccw(c97.86,792.14) 145,792.14 ccw(c192.14,792.14) P6.2@158.81,758.81 ; P3.3@131.19,966.19 cw(c97.86,932.86) 145,932.86 cw(c192.14,932.86) P3.3@158.81,966.19 ; P6.2@145,745 P3.3@145,980 135,980 85.47,1029.53 85.47,1520.47 145,1580 P1.4@155,1580
VCC_JTAG: P1.2 P3.1 | length 442
  Top Layer w20: P3.1@131.19,1193.81 ccw(c73.71,1251.29) 155,1251.29 ; P1.2@141.19,1466.19 cw(c107.86,1432.86) 155,1432.86 cw(c202.14,1432.86) P1.2@168.81,1466.19 ; P3.1@145,1180 155,1190 P1.2@155,1480
Y0: U6.4 U8.2 | length 3489.2
  Top Layer w20: v1@144.39,3939.39 cw(c106.72,3901.72) 160,3901.72 ; v1(155,3950) 160,3945 160,3710 445,3425 445,3315 U6.4@665,3095 ; U6.4@645.47,3095 ccw(c598.33,3095) 631.66,3128.34 ccw(c665,3161.67) U6.4@665,3114.53
  Bottom Layer w20: v1@144.39,3960.61 ccw(c118.79,3986.21) 155,3986.21 ccw(c191.21,3986.21) v1@165.61,3960.61 ; v1(155,3950) 155,4055 80,4130 80,4760 1180,4760 U8.2@1180,4525 ; U8.2@1166.19,4538.81 ccw(c1132.86,4572.14) 1180,4572.14 ccw(c1227.14,4572.14) U8.2@1193.81,4538.81
Y0_N: U6.3 U7.4 | length 1480.8
  Top Layer w20: U6.3@665,3195 724.53,3254.53 724.53,3400.53 900,3576 942.43,3576 1075,3443.43 1075,3420 U7.4@1500,2995 ; U6.3@665,3214.53 ccw(c665,3261.67) 698.34,3228.34 ccw(c731.67,3195) U6.3@684.53,3195 ; U7.4@1480.47,2995 ccw(c1433.33,2995) 1466.66,3028.34 ccw(c1500,3061.67) U7.4@1500,3014.53
Y1: U6.6 U9.2 | length 771.3
  Top Layer w20: U9.2@165,3220 195,3190 ; U9.2@166.51,3200.53 cw(c169.32,3164.32) 195,3190 ; U9.2@184.47,3218.49 ccw(c220.68,3215.68) 195,3190 ; U6.6@645.47,2895 ccw(c598.33,2895) 631.66,2928.34 ccw(c665,2961.67) U6.6@665,2914.53 ; U6.6@665,2895 370,3190 195,3190
Y1_N: U6.5 U7.5 | length 1613.6
  Top Layer w20: U6.5@665,2995 740,2995 754,3009 754,3184.94 764.53,3195.47 764.53,3314.53 905,3455 1000,3455 1025,3430 1025,3370 U7.5@1500,2895 ; U6.5@678.81,2981.19 cw(c712.14,2947.86) 712.14,2995 cw(c712.14,3042.14) U6.5@678.81,3008.81 ; U7.5@1480.47,2895 ccw(c1433.33,2895) 1466.66,2928.34 ccw(c1500,2961.67) U7.5@1500,2914.53
Y2: U6.8 U10.2 | length 2424.2
  Bottom Layer w20: U6.8@945.47,2795 ccw(c898.33,2795) 931.66,2828.34 ccw(c965,2861.67) U6.8@965,2814.53 ; U6.8@965,2795 905,2855 905,3425 935,3455 1180,3455 1240,3515 1395,3515 1515.47,3394.53 1595.47,3394.53 1599.53,3390.47 2097.53,3390.47 2265,3223 U10.2@2265,3120 ; U10.2@2251.19,3133.81 ccw(c2217.86,3167.14) 2265,3167.14 ccw(c2312.14,3167.14) U10.2@2278.81,3133.81
Y2_N: U6.9 U7.6 | length 713.1
  Top Layer w20: U6.9@965,2895 995,2865 ; U6.9@966.51,2875.53 cw(c969.32,2839.32) 995,2865 ; U6.9@984.47,2893.49 ccw(c1020.68,2890.68) 995,2865 ; U7.6@1480.47,2795 ccw(c1433.33,2795) 1466.66,2828.34 ccw(c1500,2861.67) U7.6@1500,2814.53 ; U7.6@1500,2795 1430,2865 995,2865
Y3: U6.10 U11.2 | length 3764.4
  Top Layer w20: U11.2@2325,4160 2435,4160 2535,4060 v1(2535,3430) v1@2535,3425 ; U11.2@2338.81,4146.19 cw(c2372.14,4112.86) 2372.14,4160 cw(c2372.14,4207.14) U11.2@2338.81,4173.81 ; v1@2524.39,3440.61 ccw(c2498.79,3466.21) 2535,3466.21 ccw(c2571.21,3466.21) v1@2545.61,3440.61
  Bottom Layer w20: U6.10@965,2975.47 cw(c965,2928.33) 998.34,2961.66 cw(c1031.67,2995) U6.10@984.53,2995 ; U6.10@965,2995 1055,2905 1055,2760 1345,2470 1368.43,2470 1373.43,2475 2100,2475 2585,2960 2585,3245 2535,3295 v1(2535,3430) ; v1@2524.39,3419.39 cw(c2498.79,3393.79) 2535,3393.79 cw(c2571.21,3393.79) v1@2545.61,3419.39
Y3_N: U6.11 U7.7 | length 930.8
  Bottom Layer w20: U6.11@965,3075.47 cw(c965,3028.33) 998.34,3061.66 cw(c1031.67,3095) U6.11@984.53,3095 ; U6.11@965,3095 1135,2925 1135,2785 1225,2695 U7.7@1500,2695 ; U7.7@1486.19,2681.19 ccw(c1452.86,2647.86) 1452.86,2695 ccw(c1452.86,2742.14) U7.7@1486.19,2708.81
pads on no net: 1.0 1.5 1.6 1.7 1.8 1.9 1.10 1.11 1.14 1.15 1.16 1.17 1.18 1.19 1.20 1.21 1.22 1.23 1.24 2.8 2.9 2.10 2.11 2.12 P1.3 P1.5 P1.6 P1.10 P1.11 P1.12 P1.13 P1.14 U4.1 U4.2 U4.3 U4.4 U4.5 U4.6 U4.12 U4.13 U4.14 U4.15 U5.9 U5.10 U5.11 U5.12 U5.13 U5.15 U6.12 U6.13 U7.9 U7.10 U7.11 U7.12 U7.13 U7.14 U7.15

## Polygon pours and split planes (outlines as drawn)
GND on Bottom Layer "Keep-Out Layer-No Net" (solid, pour order 4): 3890,4900 3890,4910 3890,-30 3880,-20 -309.33,-20 -309.33,4904.58 -314.76,4910
GND on Top Layer "Keep-Out Layer-No Net" (solid, pour order 6): -314.76,4910 3900,4910 3900,-30 -309.32,-30

## Keep-outs
Keep-Out Layer:
  the board outline again, w20

## Other copper
Top Layer:
  region: 3365,3873 3373,3873 3373,3865 3365,3865 3357,3865 3357,3873
  region: 3349,3825 3349,3833 3357,3833 3357,3825 3349,3825 3349,3817 3341,3817 3341,3825
  region: 3293,3825 3301,3825 3301,3817 3293,3817 3285,3817 3285,3825
  region: 3053,4073 3053,4081 3061,4081 3061,4073 3053,4073 3053,4065 3045,4065 3045,4073
  region: 3221,4569 3229,4569 3229,4561 3221,4561 3213,4561 3213,4569
  region: 3245,4553 3253,4553 3253,4545 3245,4545 3237,4545 3237,4553
  region: 3229,3817 3237,3817 3237,3809 3229,3809 3221,3809 3221,3817
  region: 3213,3857 3221,3857 3229,3857 3229,3849 3221,3849 3213,3849 3205,3849 3205,3857
  region: 3117,3945 3125,3945 3125,3929 3117,3929 3117,3937 3109,3937 3109,3945
  region: 3309,4185 3317,4185 3325,4185 3325,4177 3317,4177 3309,4177 3301,4177 3301,4185
  region: 3229,4537 3237,4537 3237,4521 3229,4521 3221,4521 3221,4537
  region: 3397,3889 3397,3897 3405,3897 3405,3905 3413,3905 3421,3905 3421,3897 3413,3897 3405,3897 3405,3889 3397,3889 3397,3881 3389,3881 3389,3889
  region: 3317,4449 3317,4465 3325,4465 3325,4449 3333,4449 3333,4441 3325,4441 3317,4441 3309,4441 3309,4449
  region: 3325,4553 3333,4553 3341,4553 3341,4537 3333,4537 3325,4537 3317,4537 3317,4553
  region: 3413,4345 3413,4377 3421,4377 3421,4329 3413,4329 3413,4337 3405,4337 3405,4345
  region: 3325,4521 3333,4521 3341,4521 3341,4513 3349,4513 3349,4505 3341,4505 3333,4505 3325,4505 3317,4505 3317,4521
  region: 3317,4057 3325,4057 3325,4065 3333,4065 3333,4073 3341,4073 3341,4081 3349,4081 3349,4073 3341,4073 3341,4057 3333,4057 3333,4049 3325,4049 3317,4049 3309,4049 3309,4057
  region: 3301,4017 3309,4017 3317,4017 3325,4017 3325,3993 3317,3993 3317,4001 3309,4001 3301,4001 3301,4009 3293,4009 3293,4017
  region: 3205,3905 3205,3897 3213,3897 3221,3897 3221,3873 3213,3873 3213,3881 3205,3881 3197,3881 3197,3905
  region: 3333,4121 3341,4121 3341,4129 3349,4129 3349,4113 3357,4113 3357,4097 3349,4097 3341,4097 3341,4105 3333,4105 3325,4105 3325,4121
  region: 3245,4609 3253,4609 3261,4609 3269,4609 3277,4609 3285,4609 3293,4609 3301,4609 3309,4609 3317,4609 3317,4601 3309,4601 3301,4601 3293,4601 3285,4601 3277,4601 3269,4601 3261,4601 3253,4601 3245,4601 3237,4601 3237,4609
  region: 3285,3865 3293,3865 3301,3865 3309,3865 3317,3865 3325,3865 3325,3857 3317,3857 3317,3849 3309,3849 3301,3849 3293,3849 3285,3849 3277,3849 3277,3865
  region: 3117,4049 3125,4049 3125,4057 3133,4057 3133,4049 3141,4049 3141,4073 3133,4073 3133,4081 3141,4081 3149,4081 3149,4041 3141,4041 3133,4041 3125,4041 3117,4041 3109,4041 3109,4049
  region: 3053,4153 3053,4169 3061,4169 3061,4185 3069,4185 3069,4193 3077,4193 3077,4153 3069,4153 3061,4153 3061,4129 3053,4129 3053,4145 3045,4145 3045,4153
  region: 3317,4497 3325,4497 3333,4497 3341,4497 3349,4497 3349,4449 3341,4449 3341,4465 3333,4465 3333,4473 3325,4473 3325,4481 3317,4481 3317,4489 3309,4489 3309,4497
  region: 3245,4041 3253,4041 3261,4041 3269,4041 3277,4041 3277,4017 3269,4017 3261,4017 3253,4017 3253,4009 3245,4009 3237,4009 3237,4041
  region: 3141,3945 3149,3945 3157,3945 3165,3945 3165,3937 3173,3937 3181,3937 3181,3921 3173,3921 3173,3913 3165,3913 3157,3913 3149,3913 3149,3921 3141,3921 3141,3929 3133,3929 3133,3945
  region: 3213,4353 3213,4369 3221,4369 3229,4369 3237,4369 3237,4345 3245,4345 3253,4345 3253,4329 3245,4329 3237,4329 3237,4337 3229,4337 3221,4337 3213,4337 3205,4337 3205,4353
  region: 3317,4433 3325,4433 3333,4433 3341,4433 3341,4425 3349,4425 3349,4377 3341,4377 3341,4393 3333,4393 3333,4401 3325,4401 3325,4409 3317,4409 3317,4425 3309,4425 3309,4433
  region: 3213,4441 3221,4441 3229,4441 3237,4441 3237,4433 3245,4433 3245,4425 3253,4425 3253,4409 3261,4409 3261,4401 3253,4401 3245,4401 3237,4401 3229,4401 3221,4401 3221,4425 3213,4425 3213,4433 3205,4433 3205,4441
  region: 3205,4305 3213,4305 3221,4305 3221,4289 3229,4289 3237,4289 3237,4281 3245,4281 3245,4273 3237,4273 3229,4273 3221,4273 3221,4257 3213,4257 3205,4257 3205,4273 3197,4273 3197,4305
  region: 3165,4569 3173,4569 3181,4569 3181,4561 3189,4561 3197,4561 3197,4553 3205,4553 3213,4553 3213,4545 3221,4545 3221,4537 3213,4537 3205,4537 3197,4537 3189,4537 3181,4537 3173,4537 3165,4537 3157,4537 3157,4569
  region: 3165,4529 3173,4529 3181,4529 3181,4521 3189,4521 3197,4521 3205,4521 3213,4521 3213,4513 3221,4513 3221,4505 3229,4505 3237,4505 3237,4497 3245,4497 3253,4497 3253,4473 3245,4473 3237,4473 3229,4473 3229,4481 3221,4481 3213,4481 3205,4481 3197,4481 3189,4481 3181,4481 3181,4505 3173,4505 3165,4505 3165,4513 3157,4513 3157,4529
  region: 3253,4257 3253,4329 3261,4329 3261,4345 3269,4345 3269,4361 3277,4361 3277,4369 3285,4369 3285,4393 3293,4393 3293,4409 3301,4409 3301,4401 3309,4401 3317,4401 3317,4393 3325,4393 3325,4377 3333,4377 3333,4369 3325,4369 3317,4369 3317,4361 3309,4361 3301,4361 3293,4361 3293,4353 3285,4353 3285,4345 3277,4345 3277,4329 3285,4329 3285,4337 3293,4337 3293,4345 3301,4345 3309,4345 3317,4345 3325,4345 3333,4345 3333,4337 3325,4337 3325,4313 3317,4313 3317,4329 3309,4329 3301,4329 3293,4329 3285,4329 3285,4321 3293,4321 3293,4313 3301,4313 3301,4305 3309,4305 3317,4305 3317,4297 3309,4297 3309,4289 3301,4289 3293,4289 3285,4289 3285,4273 3277,4273 3269,4273 3261,4273 3261,4257 3253,4257 3253,4241 3245,4241 3245,4257
  region: 3421,4305 3429,4305 3429,4297 3437,4297 3437,4273 3445,4273 3445,4289 3453,4289 3453,4265 3445,4265 3445,4233 3453,4233 3453,4225 3445,4225 3445,4209 3437,4209 3437,4201 3429,4201 3429,4185 3437,4185 3437,4193 3445,4193 3445,4201 3453,4201 3453,4169 3461,4169 3461,4089 3453,4089 3445,4089 3445,4137 3437,4137 3437,4145 3429,4145 3429,4161 3421,4161 3421,4169 3413,4169 3413,4305
  region: 2989,4641 2997,4641 3005,4641 3013,4641 3021,4641 3029,4641 3037,4641 3045,4641 3053,4641 3061,4641 3069,4641 3077,4641 3085,4641 3093,4641 3101,4641 3101,4625 3093,4625 3093,4609 3085,4609 3085,4601 3077,4601 3077,4577 3069,4577 3061,4577 3061,4569 3053,4569 3045,4569 3045,4553 3037,4553 3037,4521 3045,4521 3045,4505 3037,4505 3037,4513 3029,4513 3029,4449 3037,4449 3037,4441 3045,4441 3045,4449 3053,4449 3053,4441 3061,4441 3061,4409 3069,4409 3069,4401 3061,4401 3061,4377 3053,4377 3053,4369 3045,4369 3045,4329 3037,4329 3037,4305 3029,4305 3029,4329 3021,4329 3021,4297 3013,4297 3013,4273 3005,4273 3005,4209 2997,4209 2997,4201 2989,4201 2989,4177 2981,4177 2981,4641 hole: 3021,4553 3021,4537 3029,4537 3029,4553 hole: 3029,4385 3029,4353 3037,4353 3037,4369 3045,4369 3045,4393 3037,4393 3037,4385 hole: 3045,4425 3045,4401 3053,4401 3053,4425 hole: 3029,4577 3029,4569 3037,4569 3045,4569 3045,4577 3053,4577 3053,4585 3061,4585 3061,4601 3069,4601 3077,4601 3077,4609 3085,4609 3085,4625 3093,4625 3093,4633 3085,4633 3085,4625 3077,4625 3077,4617 3069,4617 3069,4609 3061,4609 3061,4601 3053,4601 3045,4601 3045,4585 3037,4585 3037,4577
  region: 102 vertices and 4 holes, not listed, extent 3309,3737 3541,4297
  region: 219 vertices and 3 holes, not listed, extent 2981,3737 3253,4289
  region: 207 vertices and 9 holes, not listed, extent 3133,4297 3541,4641
  region: 510 vertices and 4 holes, not listed, extent 3053,3881 3445,4609

## Text inside footprints (layer, text, board x,y; h text height)
P1: Top Overlay "2" at 175,1360 h50 r90; Top Overlay "1" at 275,1360 h50 r90; Top Overlay "14" at 175,2160 h50 r90; Top Overlay "13" at 275,2160 h50 r90
P4: Top Overlay "2" at 2835,3180 h50 r270; Top Overlay "1" at 2735,3180 h50 r270; Top Overlay "15" at 2735,2320 h50 r270; Top Overlay "16" at 2835,2320 h50 r270